# Altium PCB MA600_Angle_Encoder.PcbDoc
Units mil, origin at the board's own origin, x right, y up, seen from the top; angles counter-clockwise.
Board outline 1175.45 x 1091.06 mil, 2 copper layers (Top Layer, Bottom Layer); 9 components, 7 nets, 43 pads, 79 vias.
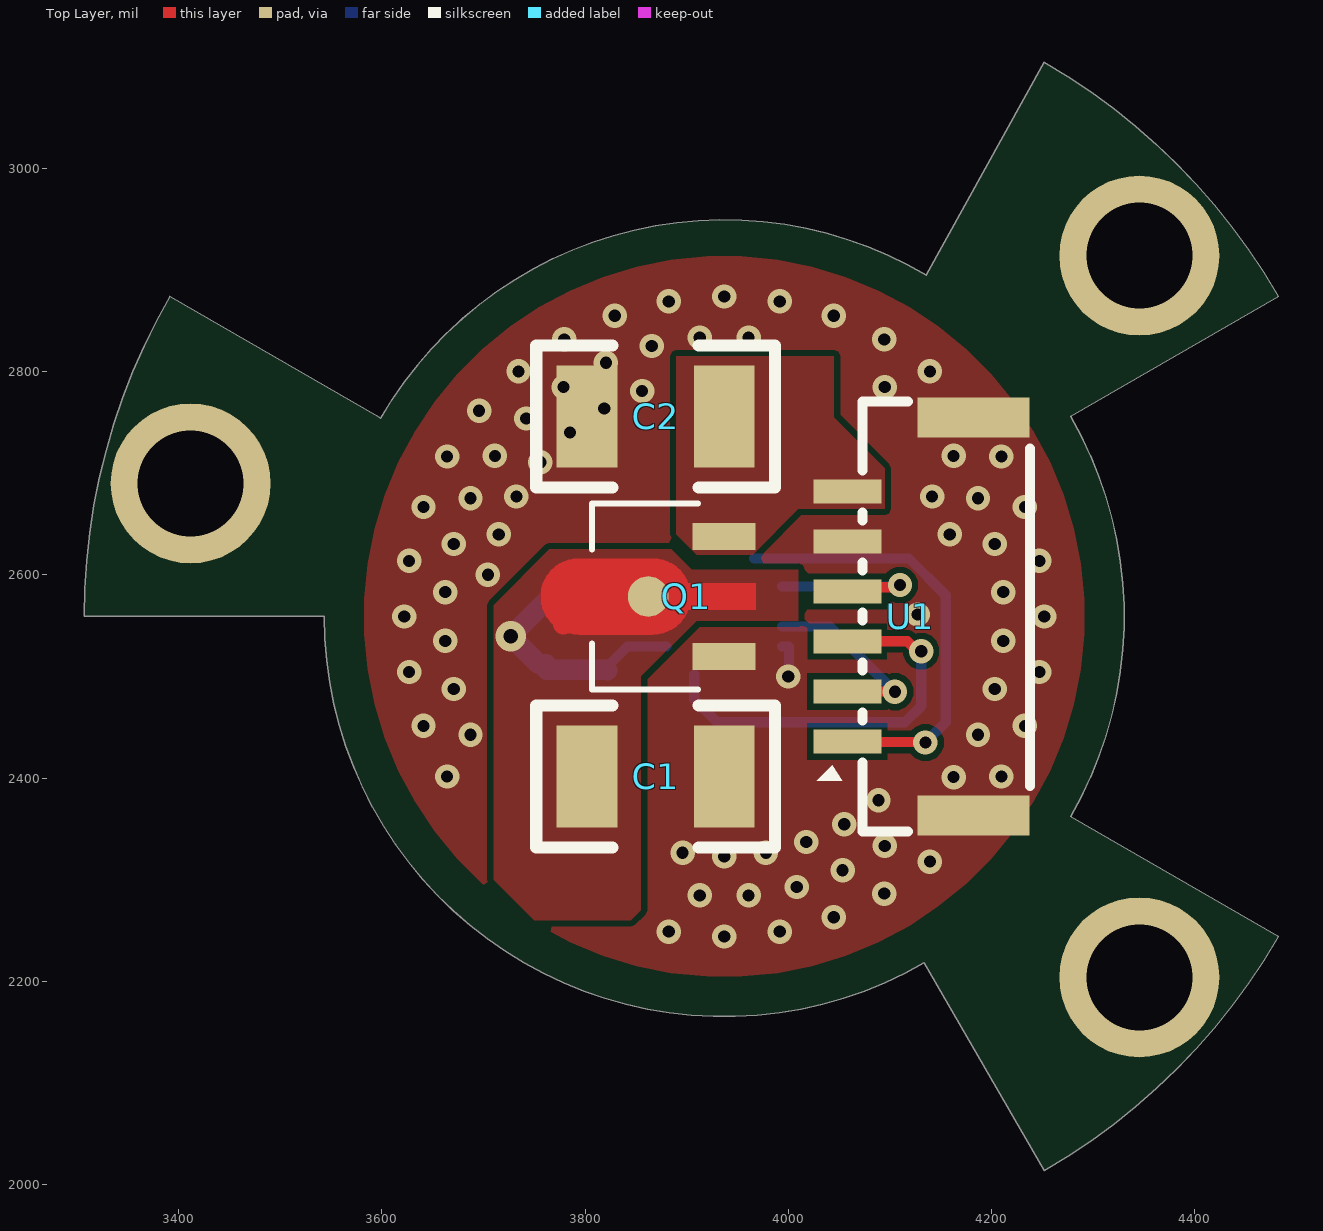
[diagram p0: Top Layer view]
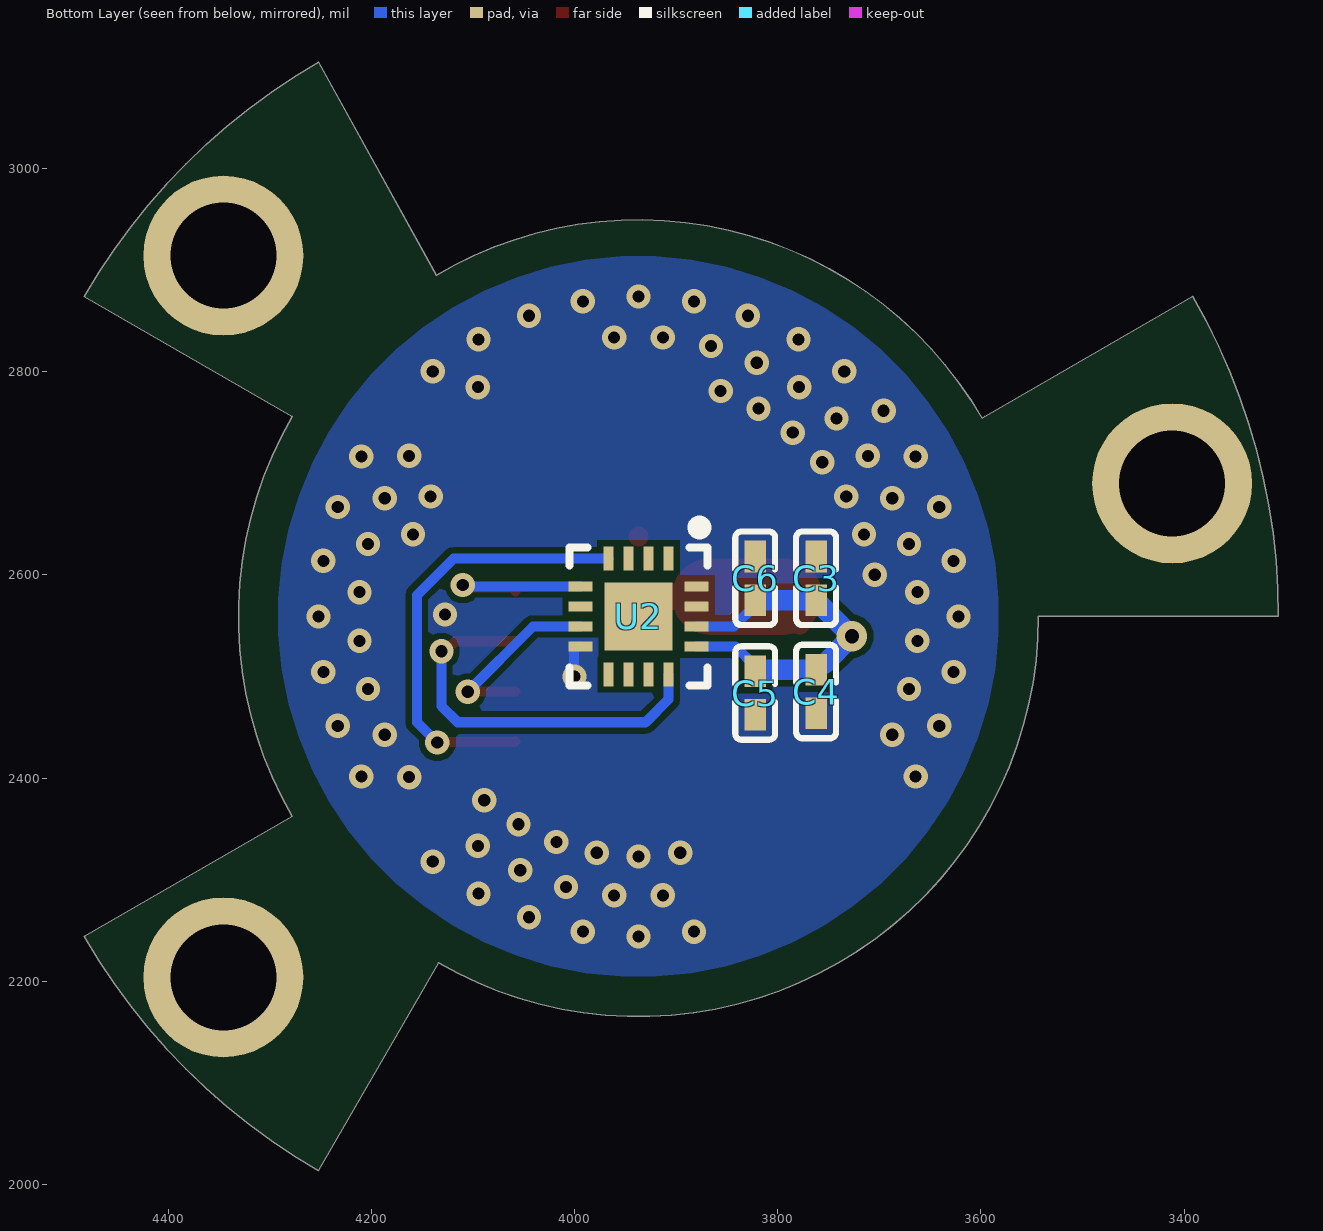
[diagram p1: Bottom Layer view, seen from below]

## Layer stack, top to bottom
Top Solder: solder mask 0.4, Solder Resist, Dk 3.5
Top Layer: signal copper 1.4
Dielectric 1: dielectric 12.6, FR-4, Dk 4.8
Bottom Layer: signal copper 1.4
Bottom Solder: solder mask 0.4, Solder Resist, Dk 3.5

## Board outline
3307.09,2559.06 cw(c3937.01,2559.05) 3391.48,2874.02 3596.05,2755.91 3598.9,2754.26 cw(c3937.01,2559.06) 4135.97,2894.96 4251.97,3104.58 cw(c3937.01,2559.05) 4482.54,2874.02 4277.96,2755.91 cw(c3937.01,2559.05) 4277.96,2362.2 4482.54,2244.09 cw(c3937.01,2559.05) 4251.97,2013.53 4133.86,2218.1 cw(c3937.01,2559.05) 3543.31,2559.06

## Design rules (kind name [scope] priority, off if disabled: settings)
Clearance [All] p1: gap=6 ignorepadtopadclearanceinfootprint=FALSE except(0: Arc-Hole Track-Hole SMDPad-Hole THPad-Hole Via-Hole Fill-Hole Poly-Hole Region-Hole Text-Hole)
HoleSize [All] p1: absolutevalues=TRUE maxlimit=10000 minlimit=1 maxpercent=80.000 minpercent=20.000
HoleToHoleClearance [All] p1: gap=5 allowstackedmicrovias=TRUE
MinimumSolderMaskSliver [All] p1: minsoldermaskwidth=2
PlaneConnect [All] p1: planeconnectstyle=Direct reliefexpansion=20 reliefentries=4 reliefconductorwidth=10 reliefairgap=10
PolygonConnect [All] p1: connectstyle=Direct reliefconductorwidth=10 reliefentries=4 polygonreliefangle="90 Angle" airgapwidth=10
RoutingVias [All] p1: holewidth=14 width=30 viastyle="Through Hole" minholewidth=12 minwidth=24 maxholewidth=28 maxwidth=50
SilkToSilkClearance [All] p1: silktosilkclearance=0
SilkToSolderMaskClearance [IsPad] p1: minsilkscreentomaskgap=0 clearancetoexposedcopper=TRUE
SolderMaskExpansion [All] p1: expansion=4 istentingtop=FALSE
Width [All] p1: maxlimit=20 minlimit=10 preferedwidth=15
24 further rules are at their usual default settings.

## Components (designator, comment, footprint, x,y, rotation, side; value= is the part's Value field where it differs from the comment)
C1 "10uF" 1210 3802.01,2401.57 r0 top
C2 "10uF" 1210 3937.01,2755.91 r180 top
C3 "1uf" C0402 3762.17,2596.66 r90 bottom
C4 "100nF" C0402 3762.17,2485.2 r270 bottom
C5 "1uF" C0402 3822.17,2483.74 r90 bottom
C6 "100nF" C0402 3822.17,2596.66 r270 bottom
Q1 "AMS1117-3.3V_C5120796" SOT-89-3_L4.5-W2.5-P1.50-LS4.2-BR 3862.17,2578.73 r0 top
U1 "BX-GH1.25-6PWT" CONN-SMD_6P-P1.25_BX-GH1.25-6PWT 4133.86,2559.06 r90 top
U2 "MA600" qfn-16-l3.0-w3.0-p0.50-tl-ep1.7 3937.01,2559.06 r270 bottom locked

## Footprints (in the part's own frame and the unit in brackets; to place one, negate y for a bottom-side part, rotate by r counter-clockwise, add the part's x,y. Pads: shape width x height; smd on the part's side, far side on the other; paste and mask are expansions set on the pad)
1210 [mil]
  rect 60x100 smd: 1(0,0) 2(135,0)
  silkscreen extent -50,-70 185,70, body extent 4,-49 130,49, height 30
C0402 [mm]
  rect 0.79x0.54 smd paste-100 mask+0.051: 1(-0.545,0) 2(0.545,0)
  silkscreen extent -1.17,-0.5 1.17,0.5
CONN-SMD_6P-P1.25_BX-GH1.25-6PWT [mm]
  rect 0.6x1.7 smd paste+0 mask+0.05: 1(-3.126,1.925) 2(-1.876,1.925) 3(-0.626,1.925) 4(0.624,1.925) 5(1.874,1.925) 6(3.124,1.925)
  rect 1x2.8 smd paste+0 mask+0.05: 7(4.974,-1.225) 8(-4.976,-1.225)
  silkscreen extent -5.37,-2.65 5.37,2.69
qfn-16-l3.0-w3.0-p0.50-tl-ep1.7 [mm]
  rect 0.6x0.25 smd: 1(-1.45,0.75) 2(-1.45,0.25) 3(-1.45,-0.25) 4(-1.45,-0.75) 9(1.45,-0.75) 10(1.45,-0.25) 11(1.45,0.25) 12(1.45,0.75)
  rect 0.25x0.6 smd: 5(-0.75,-1.45) 6(-0.25,-1.45) 7(0.25,-1.45) 8(0.75,-1.45) 13(0.75,1.45) 14(0.25,1.45) 15(-0.25,1.45) 16(-0.75,1.45)
  rect 1.7x1.7 smd: 17(0,0)
  silkscreen extent -2.38,-1.72 1.72,1.72, body extent -1.55,-1.55 1.55,1.55, height 0.94
SOT-89-3_L4.5-W2.5-P1.50-LS4.2-BR [mil]
  rect 62.01x26.46 smd paste+0 mask+2: 1(74.84,-59.04) 3(74.84,59.07)
  round 40 smd: 2(0,0)
  Top Layer region: -68.45,37.4 4.55,37.4 6.3,37.36 8.05,37.24 9.79,37.03 11.52,36.75 13.24,36.38 14.93,35.93 16.61,35.4 18.25,34.8 19.87,34.12 21.45,33.36 23,32.54 24.5,31.63 25.96,30.66 27.38,29.63 28.74,28.53 30.05,27.36 31.3,26.13 32.5,24.85 33.63,23.51 34.7,22.12 35.71,20.69 36.64,19.2 37.51,17.68 38.3,16.11 39.02,12.99 105.84,12.99 105.84,-12.99 39.02,-12.99 38.3,-16.12 37.51,-17.68 36.64,-19.21 35.71,-20.69 34.7,-22.13 33.63,-23.52 32.5,-24.85 31.3,-26.14 30.05,-27.36 28.74,-28.53 27.38,-29.63 25.96,-30.67 24.5,-31.64 23,-32.54 21.45,-33.37 19.87,-34.12 18.25,-34.8 16.61,-35.41 14.93,-35.93 13.24,-36.38 11.52,-36.75 9.79,-37.03 8.05,-37.24 6.3,-37.36 4.55,-37.4 -68.45,-37.4 -70.2,-37.36 -71.95,-37.24 -73.7,-37.03 -75.43,-36.75 -77.14,-36.38 -78.84,-35.93 -80.51,-35.41 -82.15,-34.8 -83.77,-34.12 -85.35,-33.37 -86.9,-32.54 -88.4,-31.64 -89.86,-30.67 -91.28,-29.63 -92.64,-28.53 -93.95,-27.36 -95.21,-26.14 -96.4,-24.85 -97.54,-23.52 -98.61,-22.13 -99.61,-20.69 -100.55,-19.21 -101.41,-17.68 -102.2,-16.12 -102.92,-14.52 -103.56,-12.88 -104.13,-11.22 -104.62,-9.54 -105.02,-7.83 -105.35,-6.11 -105.6,-4.38 -105.76,-2.63 -105.84,-0.88 -105.84,0.88 -105.76,2.63 -105.6,4.37 -105.35,6.11 -105.02,7.83 -104.62,9.54 -104.13,11.22 -103.56,12.88 -102.92,14.51 -102.2,16.11 -101.41,17.68 -100.55,19.2 -99.61,20.69 -98.61,22.12 -97.54,23.51 -96.4,24.85 -95.21,26.13 -93.95,27.36 -92.64,28.53 -91.28,29.63 -89.86,30.66 -88.4,31.63 -86.9,32.54 -85.35,33.36 -83.77,34.12 -82.15,34.8 -80.51,35.4 -78.84,35.93 -77.14,36.38 -75.43,36.75 -73.7,37.03 -71.95,37.24 -70.2,37.36
  silkscreen extent -55,-92 49,92

## Part data
C1 C2: library part 1210贴片电容, "1210贴片电容"
C3 C4 C5 C6: library part 0402贴片电容, "贴片电容0402"
U2: "磁编码器"

## Free pads (board coordinates)
  round 157.48 hole 104.33: 2(4345.56,2914.21) 3(4345.56,2203.91) 4(3411.75,2690.02)

## Via types
v1: diameter 24, hole 12, Top Layer to Bottom Layer, tented both sides, 78 vias
v2: diameter 30, hole 14, Top Layer to Bottom Layer, tented both sides, 1 vias

## Nets (pads, with @x,y where several pads share a name; then routed paths per layer and width w, separated by ;. In a path a pad name is that pad's centre, name@x,y a point inside that pad or via, vN(x,y) a via of type N, cw(c..) or ccw(c..) an arc to the next point about the centre after c; other vN are vias at no path point)
+3.3: C1.1 C3.1 C4.1 C5.2 C6.2 Q1.2 U2.13 U2.14 | length 498.9
  Top Layer w20: 3778.43,2551.33 3778.43,2586.71 3790.14,2598.43 3811.57,2598.43 3827.45,2582.55 3858.34,2582.55 Q1.2
  Bottom Layer w10: C5.2 3822.17,2506.03 3822.17,2510.12 3841.57,2529.53 U2.13 ; C6.2 3822.17,2570.27 3843.22,2549.22 U2.14
  Bottom Layer w20: C3.1@3762.17,2574.87 3762.17,2570.27 3761.54,2569.64 3756.94,2569.64 v2(3726.91,2539.62) 3754.32,2512.21 3761.54,2512.21 3762.17,2511.58 C4.1 3821.54,2506.66 C5.2@3822.17,2506.03 ; C3.1@3762.17,2575.08 3822.05,2575.08 C6.2
GND: C1.2 C2.2 C3.2 C4.2 C5.1 C6.1 Q1.1 U1.5 U1.7 U1.8 U2.8 | length 36.2
  Bottom Layer w10: U2.8 4000.52,2529.53 4000.6,2529.45 4000.6,2500.6 v1(4000,2500)
  other v1: 3937.01,2244.09 3882.32,2248.88 3991.7,2248.88 4044.73,2263.09 3912.99,2284.51 3961.03,2284.51 4094.49,2286.29 4008.34,2292.85 4053.48,2309.29 4139.46,2317.78 3937.01,2322.83 3895.99,2326.42 3978.03,2326.42 4095.08,2333.3 4017.8,2337.08 4055.12,2354.48 4088.85,2378.1 4162.76,2400.98 3664.24,2401.57 4209.77,2401.57 3687.24,2442.59 4186.78,2442.59 3641.04,2451.33 4232.97,2451.33 3670.81,2487.73 4203.21,2487.73 3626.83,2504.36 4247.18,2504.36 3662.47,2535.04 4211.55,2535.04 3622.05,2559.06 4251.97,2559.06 4127.43,2560.99 3662.47,2583.07 4211.55,2583.07 3704.38,2600.07 3626.83,2613.75 4247.18,2613.75 3670.81,2630.38 4203.21,2630.38 3715.03,2639.85 4158.98,2639.85 3641.04,2666.78 4232.97,2666.78 3687.24,2675.52 4186.78,2675.52 3732.43,2677.17 4141.58,2677.17 3756.05,2710.89 3664.24,2716.54 3711.26,2717.13 4162.76,2717.13 4209.77,2716.54 3785.17,2740.01 3742.14,2753.93 3695.73,2761.51 3818.9,2763.63 3856.22,2781.03 3778.94,2784.81 4095.08,2784.81 3734.55,2800.33 4139.46,2800.33 3820.54,2808.83 3865.68,2825.26 3779.53,2831.82 4094.49,2831.82 3912.99,2833.6 3961.03,2833.6 3829.28,2855.02 4044.73,2855.02 3882.32,2869.23 3991.7,2869.23 3937.01,2874.02
SPI_CSN: U1.4 U2.5 | length 171
  Top Layer w10: U1.4 4062.35,2587.9 4107.9,2587.9 v1(4110,2590)
  Bottom Layer w10: U2.5 3994.18,2588.66 4108.66,2588.66 v1(4110,2590)
SPI_MISO: U1.2 U2.7 | length 184.5
  Top Layer w10: U1.2 4058.2,2485.11 4104.89,2485.11 v1(4105,2485)
  Bottom Layer w10: U2.7 4040.78,2549.22 v1(4105,2485)
SPI_MOSI: U1.1 U2.4 | length 434
  Top Layer w10: U1.1 4058.59,2435.5 4134.5,2435.5 v1(4135,2435)
  Bottom Layer w10: U2.4 4118.85,2616.15 4155,2580 4155,2455 v1(4135,2435)
SPI_SCLK: U1.3 U2.12 | length 394.7
  Top Layer w10: U1.3 4058.38,2534.71 4117.24,2534.71 4127.08,2524.87 v1(4130.87,2524.87)
  Bottom Layer w10: U2.12 3907.48,2477.52 3930,2455 4115,2455 4130.87,2470.87 v1(4130.87,2524.87)
VDD: C2.1 Q1.3 U1.6 | length 0
pads on no net: U2.1 U2.2 U2.3 U2.6 U2.9 U2.10 U2.11 U2.15 U2.16 U2.17

## Polygon pours and split planes (outlines as drawn)
GND on Top Layer "GND_L01_P003" (solid, remove dead copper, pour order 3): 3582.68,2559.06 ccw(c3937.01,2559.06) 3937.01,2204.72 ccw(c3937.01,2559.06) 4291.34,2559.06 ccw(c3937.01,2559.06) 3937.01,2913.39 ccw(c3937.01,2559.06)
VDD on Top Layer "VDD_L01_P001" (solid, remove dead copper, pour order 1): 4010,2665 3965,2620 3910,2620 3890,2640 3890,2815 4045,2815 4045,2755 4095,2705 4095,2665
+3.3 on Top Layer "+3.3_L01_P000" (solid, remove dead copper, pour order 0): 3710,2300 3710,2570 3765,2625 3885,2625 3905,2605 4010,2605 4010,2555 3910,2555 3855,2500 3855,2270 3845,2260 3750,2260
GND on Bottom Layer "GND_L02_P004" (solid, remove dead copper, pour order 4): 3582.68,2559.06 ccw(c3937.01,2559.06) 3937.01,2204.72 ccw(c3937.01,2559.06) 4291.34,2559.06 ccw(c3937.01,2559.06) 3937.01,2913.39 ccw(c3937.01,2559.06)

## Silkscreen, mask and mechanical layers (free items; w line width, h text height)
Mechanical 1:
  lines w10: 3596.05,2755.91 3391.48,2874.02 ccw(c3937.01,2559.06) 3307.09,2559.06 3543.31,2559.06 ccw(c3937.01,2559.06) 4133.86,2218.1 4251.97,2013.53 ccw(c3937.01,2559.06) 4482.54,2244.09 4277.96,2362.2 ccw(c3937.01,2559.06) 4277.96,2755.91 4482.54,2874.02 ccw(c3937.01,2559.06) 4251.97,3104.58 4135.97,2894.96 ccw(c3937.01,2559.06) 3598.9,2754.26